# Altium PCB Debugprobe2.PcbDoc
Units mm, origin at the board's own origin, x right, y up, seen from the top; angles counter-clockwise.
Board outline 67.82 x 74.3 mm, 2 copper layers (Top Layer, Bottom Layer); 8 components, 108 nets, 280 pads, 108 vias.
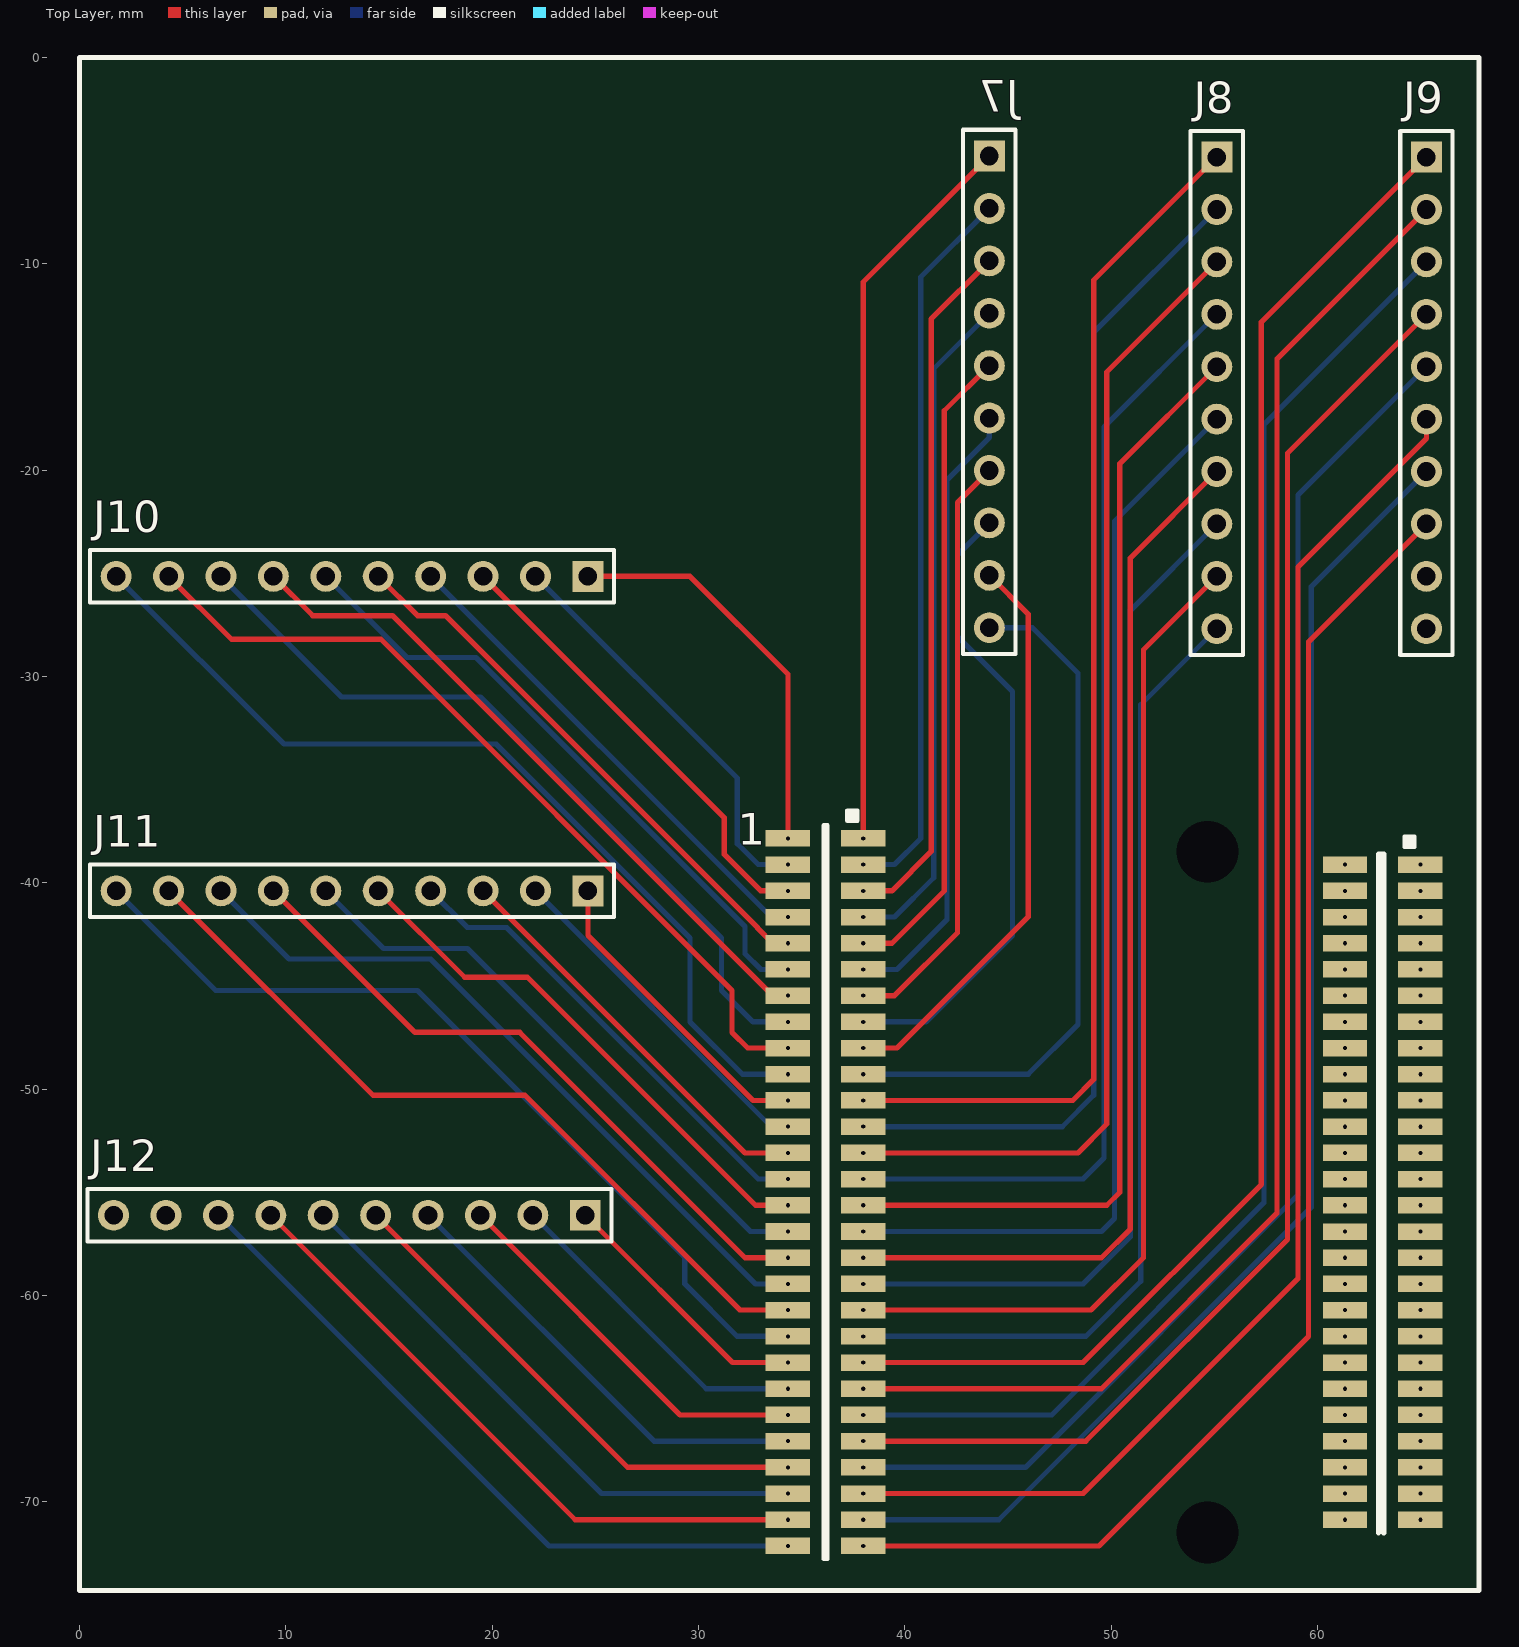
[diagram p0: Top Layer view]
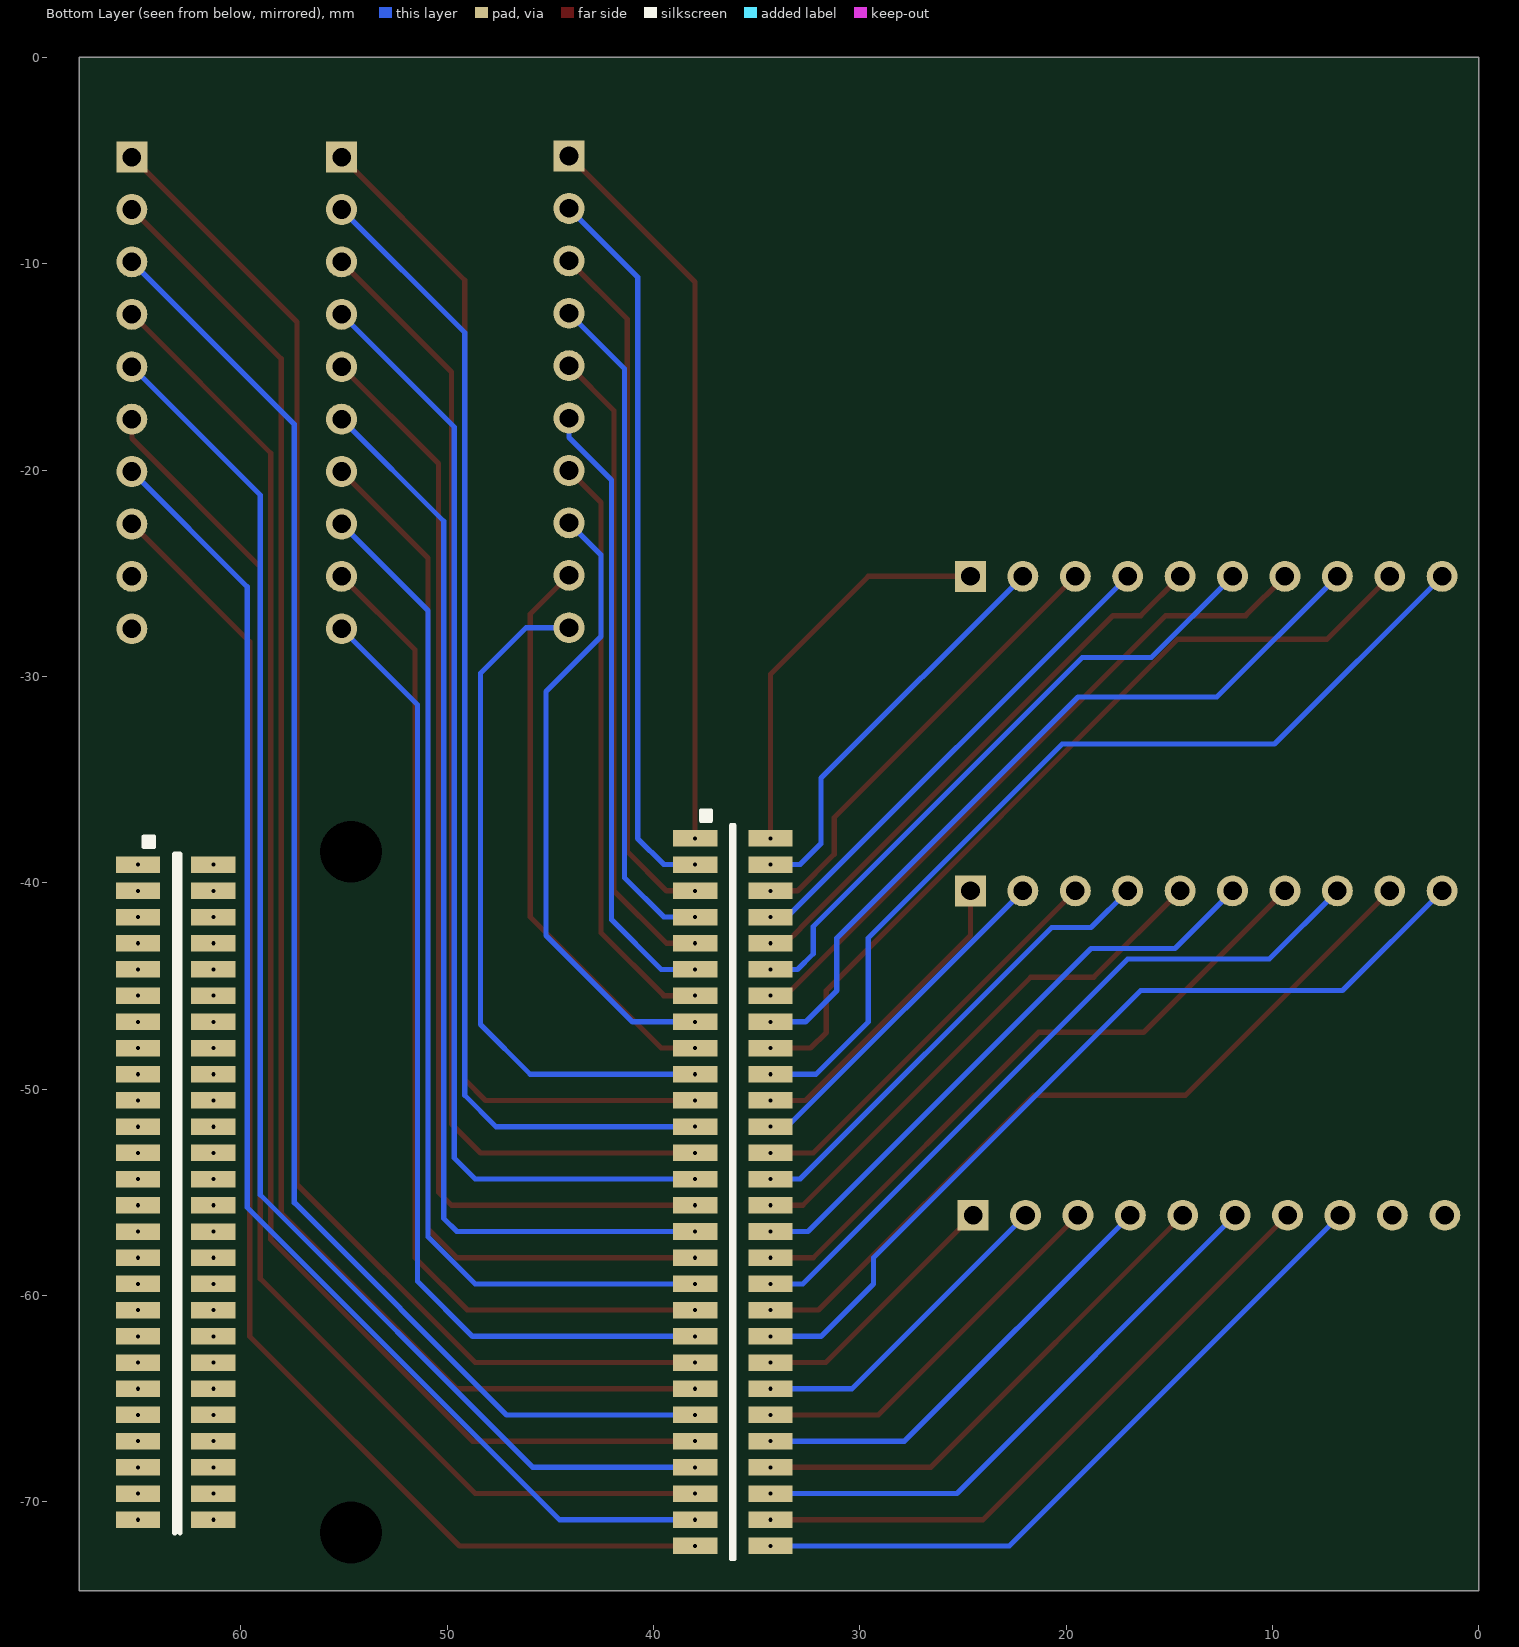
[diagram p1: Bottom Layer view, seen from below]

## Layer stack, top to bottom
Top Solder: solder mask 0.0102, Solder Resist, Dk 3.5
Top Layer: signal copper 0.0356
Dielectric 1: dielectric 0.32, FR-4, Dk 4.8
Bottom Layer: signal copper 0.0356
Bottom Solder: solder mask 0.0102, Solder Resist, Dk 3.5

## Board outline
0,-74.295 0,0 67.818,0 67.818,-74.295

## Design rules (kind name [scope] priority, off if disabled: settings)
Clearance [All] p1: gap=0.254
PolygonConnect [All] p1: connectstyle=Relief reliefconductorwidth=0.254 reliefentries=4 polygonreliefangle="90 Angle" airgapwidth=0.254
RoutingVias [All] p1: holewidth=0.711 width=1.27 viastyle="Through Hole" minholewidth=0.711 minwidth=1.27 maxholewidth=0.711 maxwidth=1.27
SolderMaskExpansion [All] p1: expansion=0.102
Width [All] p1: maxlimit=0.254 minlimit=0.254 preferedwidth=0.254
30 further rules are at their usual default settings.

## Classes and differential pairs
component class debugprobe2: 1 J7 J8 J9 J10 J11 J12

## Components (designator, comment, footprint, x,y, rotation, side; value= is the part's Value field where it differs from the comment)
1 "Anybus_CC_B40" Anybus-CC-B40#1 49.657,-54.991 r0 top
J7 "Header 10x1" "HEADER 10X1" 44.094,-4.775 r270 top
J8 "Header 10x1" "HEADER 10X1" 55.118,-4.826 r270 top
J9 "Header 10x1" "HEADER 10X1" 65.278,-4.826 r270 top
J10 "Header 10x1" "HEADER 10X1" 24.638,-25.146 r180 top
J11 "Header 10x1" "HEADER 10X1" 24.638,-40.386 r180 top
J12 "Header 10x1" "HEADER 10X1" 24.511,-56.109 r180 top
? "Anybus_CC_B40" Anybus-CC-B40#2 49.657,-54.991 r0 bottom

## Footprints (in the part's own frame and the unit in brackets; to place one, negate y for a bottom-side part, rotate by r counter-clockwise, add the part's x,y. Pads: shape width x height; smd on the part's side, far side on the other; paste and mask are expansions set on the pad)
Anybus-CC-B40#1 [mm]
  rect 2.15x0.8 smd: 1(15.325,15.874) 2(11.675,15.874) 3(15.325,14.604) 4(11.675,14.604) 5(15.325,13.334) 6(11.675,13.334) 7(15.325,12.064) 8(11.675,12.064) 9(15.325,10.794) 10(11.675,10.794) 11(15.325,9.524) 12(11.675,9.524) 13(15.325,8.254) 14(11.675,8.254) 15(15.325,6.984) 16(11.675,6.984) 17(15.325,5.714) 18(11.675,5.714) 19(15.325,4.444) 20(11.675,4.444) 21(15.325,3.174) 22(11.675,3.174) 23(15.325,1.904) 24(11.675,1.904) 25(15.325,0.634) 26(11.675,0.634) 27(15.325,-0.636) 28(11.675,-0.636) 29(15.325,-1.906) 30(11.675,-1.906) 31(15.325,-3.176) 32(11.675,-3.176) 33(15.325,-4.446) 34(11.675,-4.446) 35(15.325,-5.716) 36(11.675,-5.716) 37(15.325,-6.986) 38(11.675,-6.986) 39(15.325,-8.256) 40(11.675,-8.256) 41(15.325,-9.526) 42(11.675,-9.526) 43(15.325,-10.796) 44(11.675,-10.796) 45(15.325,-12.066) 46(11.675,-12.066) 47(15.325,-13.336) 48(11.675,-13.336) 49(15.325,-14.606) 50(11.675,-14.606) 51(15.325,-15.876) 52(11.675,-15.876) 101(-11.675,17.145) 102(-15.325,17.145) 103(-11.675,15.875) 104(-15.325,15.875) 105(-11.675,14.605) 106(-15.325,14.605) 107(-11.675,13.335) 108(-15.325,13.335) 109(-11.675,12.065) 110(-15.325,12.065) 111(-11.675,10.795) 112(-15.325,10.795) 113(-11.675,9.525) 114(-15.325,9.525) 115(-11.675,8.255) 116(-15.325,8.255) 117(-11.675,6.985) 118(-15.325,6.985) 119(-11.675,5.715) 120(-15.325,5.715) 121(-11.675,4.445) 122(-15.325,4.445) 123(-11.675,3.175) 124(-15.325,3.175) 125(-11.675,1.905) 126(-15.325,1.905) 127(-11.675,0.635) 128(-15.325,0.635) 129(-11.675,-0.635) 130(-15.325,-0.635) 131(-11.675,-1.905) 132(-15.325,-1.905) 133(-11.675,-3.175) 134(-15.325,-3.175) 135(-11.675,-4.445) 136(-15.325,-4.445) 137(-11.675,-5.715) 138(-15.325,-5.715) 139(-11.675,-6.985) 140(-15.325,-6.985) 141(-11.675,-8.255) 142(-15.325,-8.255) 143(-11.675,-9.525) 144(-15.325,-9.525) 145(-11.675,-10.795) 146(-15.325,-10.795) 147(-11.675,-12.065) 148(-15.325,-12.065) 149(-11.675,-13.335) 150(-15.325,-13.335) 151(-11.675,-14.605) 152(-15.325,-14.605) 153(-11.675,-15.875) 154(-15.325,-15.875) 155(-11.675,-17.145) 156(-15.325,-17.145)
  round 1.524 hole 3: 11(5,-16.5) 11(5,16.5)
  silkscreen extent -13.58,-17.78 15.05,18.5, body extent -15.05,-17.3 15.05,17.3, height 4.4
Anybus-CC-B40#2 [mm]
  round 1.524 hole 3: 1(5,-16.5) 1(5,16.5)
  rect 2.15x0.8 smd: 1(15.325,-15.874) 2(11.675,-15.874) 3(15.325,-14.604) 4(11.675,-14.604) 5(15.325,-13.334) 6(11.675,-13.334) 7(15.325,-12.064) 8(11.675,-12.064) 9(15.325,-10.794) 10(11.675,-10.794) 11(15.325,-9.524) 12(11.675,-9.524) 13(15.325,-8.254) 14(11.675,-8.254) 15(15.325,-6.984) 16(11.675,-6.984) 17(15.325,-5.714) 18(11.675,-5.714) 19(15.325,-4.444) 20(11.675,-4.444) 21(15.325,-3.174) 22(11.675,-3.174) 23(15.325,-1.904) 24(11.675,-1.904) 25(15.325,-0.634) 26(11.675,-0.634) 27(15.325,0.636) 28(11.675,0.636) 29(15.325,1.906) 30(11.675,1.906) 31(15.325,3.176) 32(11.675,3.176) 33(15.325,4.446) 34(11.675,4.446) 35(15.325,5.716) 36(11.675,5.716) 37(15.325,6.986) 38(11.675,6.986) 39(15.325,8.256) 40(11.675,8.256) 41(15.325,9.526) 42(11.675,9.526) 43(15.325,10.796) 44(11.675,10.796) 45(15.325,12.066) 46(11.675,12.066) 47(15.325,13.336) 48(11.675,13.336) 49(15.325,14.606) 50(11.675,14.606) 51(15.325,15.876) 52(11.675,15.876) 101(-11.675,-17.145) 102(-15.325,-17.145) 103(-11.675,-15.875) 104(-15.325,-15.875) 105(-11.675,-14.605) 106(-15.325,-14.605) 107(-11.675,-13.335) 108(-15.325,-13.335) 109(-11.675,-12.065) 110(-15.325,-12.065) 111(-11.675,-10.795) 112(-15.325,-10.795) 113(-11.675,-9.525) 114(-15.325,-9.525) 115(-11.675,-8.255) 116(-15.325,-8.255) 117(-11.675,-6.985) 118(-15.325,-6.985) 119(-11.675,-5.715) 120(-15.325,-5.715) 121(-11.675,-4.445) 122(-15.325,-4.445) 123(-11.675,-3.175) 124(-15.325,-3.175) 125(-11.675,-1.905) 126(-15.325,-1.905) 127(-11.675,-0.635) 128(-15.325,-0.635) 129(-11.675,0.635) 130(-15.325,0.635) 131(-11.675,1.905) 132(-15.325,1.905) 133(-11.675,3.175) 134(-15.325,3.175) 135(-11.675,4.445) 136(-15.325,4.445) 137(-11.675,5.715) 138(-15.325,5.715) 139(-11.675,6.985) 140(-15.325,6.985) 141(-11.675,8.255) 142(-15.325,8.255) 143(-11.675,9.525) 144(-15.325,9.525) 145(-11.675,10.795) 146(-15.325,10.795) 147(-11.675,12.065) 148(-15.325,12.065) 149(-11.675,13.335) 150(-15.325,13.335) 151(-11.675,14.605) 152(-15.325,14.605) 153(-11.675,15.875) 154(-15.325,15.875) 155(-11.675,17.145) 156(-15.325,17.145)
  silkscreen extent -13.58,-18.5 15.05,17.78, body extent -15.05,-17.3 15.05,17.3, height 4.4
"HEADER 10X1" [mm] "Connector; Header; 10 Position"
  rect 1.5x1.5 hole 0.9: 1(0,0)
  round 1.5 hole 0.9: 2(2.54,0) 3(5.08,0) 4(7.62,0) 5(10.16,0) 6(12.7,0) 7(15.24,0) 8(17.78,0) 9(20.32,0) 10(22.86,0)
  silkscreen extent -1.27,-1.27 24.13,1.27

## Via types
v1: diameter 0.5, hole 0.2, Top Layer to Bottom Layer, 108 vias

## Nets (pads, with @x,y where several pads share a name; then routed paths per layer and width w, separated by ;. In a path a pad name is that pad's centre, name@x,y a point inside that pad or via, vN(x,y) a via of type N, cw(c..) or ccw(c..) an arc to the next point about the centre after c; other vN are vias at no path point)
1: 1.1 ?.1@64.982,-39.117
  other v1: 64.982,-39.117
2: 1.2 ?.2
  other v1: 61.332,-39.117
3: 1.3 ?.3
  other v1: 64.982,-40.387
4: 1.4 ?.4
  other v1: 61.332,-40.387
5: 1.5 ?.5
  other v1: 64.982,-41.657
6: 1.6 ?.6
  other v1: 61.332,-41.657
7: 1.7 ?.7
  other v1: 64.982,-42.927
8: 1.8 ?.8
  other v1: 61.332,-42.927
9: 1.9 ?.9
  other v1: 64.982,-44.197
10: 1.10 ?.10
  other v1: 61.332,-44.197
11: 1.11@64.982,-45.467 ?.11
  other v1: 64.982,-45.467
12: 1.12 ?.12
  other v1: 61.332,-45.467
13: 1.13 ?.13
  other v1: 64.982,-46.737
14: 1.14 ?.14
  other v1: 61.332,-46.737
15: 1.15 ?.15
  other v1: 64.982,-48.007
16: 1.16 ?.16
  other v1: 61.332,-48.007
17: 1.17 ?.17
  other v1: 64.982,-49.277
18: 1.18 ?.18
  other v1: 61.332,-49.277
19: 1.19 ?.19
  other v1: 64.982,-50.547
20: 1.20 ?.20
  other v1: 61.332,-50.547
21: 1.21 ?.21
  other v1: 64.982,-51.817
22: 1.22 ?.22
  other v1: 61.332,-51.817
23: 1.23 ?.23
  other v1: 64.982,-53.087
24: 1.24 ?.24
  other v1: 61.332,-53.087
25: 1.25 ?.25
  other v1: 64.982,-54.357
26: 1.26 ?.26
  other v1: 61.332,-54.357
27: 1.27 ?.27
  other v1: 64.982,-55.627
28: 1.28 ?.28
  other v1: 61.332,-55.627
29: 1.29 ?.29
  other v1: 64.982,-56.897
30: 1.30 ?.30
  other v1: 61.332,-56.897
31: 1.31 ?.31
  other v1: 64.982,-58.167
32: 1.32 ?.32
  other v1: 61.332,-58.167
33: 1.33 ?.33
  other v1: 64.982,-59.437
34: 1.34 ?.34
  other v1: 61.332,-59.437
35: 1.35 ?.35
  other v1: 64.982,-60.707
36: 1.36 ?.36
  other v1: 61.332,-60.707
37: 1.37 ?.37
  other v1: 64.982,-61.977
38: 1.38 ?.38
  other v1: 61.332,-61.977
39: 1.39 ?.39
  other v1: 64.982,-63.247
40: 1.40 ?.40
  other v1: 61.332,-63.247
41: 1.41 ?.41
  other v1: 64.982,-64.517
42: 1.42 ?.42
  other v1: 61.332,-64.517
43: 1.43 ?.43
  other v1: 64.982,-65.787
44: 1.44 ?.44
  other v1: 61.332,-65.787
45: 1.45 ?.45
  other v1: 64.982,-67.057
46: 1.46 ?.46
  other v1: 61.332,-67.057
47: 1.47 ?.47
  other v1: 64.982,-68.327
48: 1.48 ?.48
  other v1: 61.332,-68.327
49: 1.49 ?.49
  other v1: 64.982,-69.597
50: 1.50 ?.50
  other v1: 61.332,-69.597
51: 1.51 ?.51
  other v1: 64.982,-70.867
52: 1.52 ?.52
  other v1: 61.332,-70.867
101: 1.101 ?.101 J7.1 | length 35.6
  Top Layer w0.254: v1(37.982,-37.846) 37.982,-10.888 J7.1
102: 1.102 ?.102 J10.1 | length 19.6
  Top Layer w0.254: J10.1 29.591,-25.146 34.332,-29.887 v1(34.332,-37.846)
103: 1.103 ?.103 J7.2 | length 35.2
  Bottom Layer w0.254: v1(37.982,-39.116) 39.497,-39.116 40.767,-37.846 40.767,-10.643 J7.2
104: 1.104 ?.104 J10.2 | length 19.9
  Bottom Layer w0.254: J10.2 31.877,-34.925 31.877,-38.1 32.893,-39.116 v1(34.332,-39.116)
105: 1.105 ?.105 J7.3 | length 33.9
  Top Layer w0.254: v1(37.982,-40.386) 39.37,-40.386 41.275,-38.481 41.275,-12.675 J7.3
106: 1.106 ?.106 J10.3 | length 22.1
  Top Layer w0.254: J10.3 31.242,-36.83 31.242,-38.608 33.02,-40.386 v1(34.332,-40.386)
107: 1.107 ?.107 J7.4 | length 32.7
  Bottom Layer w0.254: v1(37.982,-41.656) 39.497,-41.656 41.402,-39.751 41.402,-15.088 J7.4
108: 1.108 ?.108 J10.4 | length 24.2
  Bottom Layer w0.254: J10.4 33.528,-41.656 v1(34.332,-41.656)
109: 1.109 ?.109 J7.5 | length 31.3
  Top Layer w0.254: v1(37.982,-42.926) 39.37,-42.926 41.91,-40.386 41.91,-17.12 J7.5
110: 1.110 ?.110 J10.5 | length 27.2
  Top Layer w0.254: J10.5 16.383,-27.051 17.736,-27.051 32.876,-42.191 32.876,-42.214 33.588,-42.926 v1(34.332,-42.926)
111: 1.111 ?.111 J7.6 | length 30.2
  Bottom Layer w0.254: v1(37.982,-44.196) 39.624,-44.196 42.037,-41.783 42.037,-20.473 44.094,-18.416 J7.6
112: 1.112 ?.112 J10.6 | length 31.1
  Bottom Layer w0.254: J10.6 15.875,-29.083 19.219,-29.083 32.258,-42.122 32.258,-43.434 33.02,-44.196 v1(34.332,-44.196)
113: 1.113 ?.113 J7.7 | length 28.9
  Top Layer w0.254: v1(37.982,-45.466) 39.497,-45.466 42.545,-42.418 42.545,-21.565 J7.7
114: 1.114 ?.114 J10.7 | length 33.4
  Top Layer w0.254: J10.7 11.303,-27.051 15.173,-27.051 33.588,-45.466 v1(34.332,-45.466)
115: 1.115 ?.115 J7.8 | length 30.7
  Bottom Layer w0.254: v1(37.982,-46.736) 41.021,-46.736 45.212,-42.545 45.212,-30.734 42.545,-28.067 42.545,-24.105 J7.8
116: 1.116 ?.116 J10.8 | length 37.9
  Bottom Layer w0.254: J10.8 12.7,-30.988 19.431,-30.988 31.115,-42.672 31.115,-45.212 32.639,-46.736 v1(34.332,-46.736)
117: 1.117 ?.117 J7.9 | length 28
  Top Layer w0.254: v1(37.982,-48.006) 39.624,-48.006 45.974,-41.656 45.974,-26.975 J7.9
118: 1.118 ?.118 J10.9 | length 40.7
  Top Layer w0.254: J10.9 7.366,-28.194 14.605,-28.194 31.623,-45.212 31.623,-47.244 32.385,-48.006 v1(34.332,-48.006)
119: 1.119 ?.119 J7.10 | length 33.6
  Bottom Layer w0.254: v1(37.982,-49.276) 45.974,-49.276 48.387,-46.863 48.387,-29.845 46.177,-27.635 J7.10
120: 1.120 ?.120 J10.10 | length 44.9
  Bottom Layer w0.254: J10.10 9.906,-33.274 20.193,-33.274 29.591,-42.672 29.591,-46.736 32.131,-49.276 v1(34.332,-49.276)
121: 1.121 ?.121 J8.1 | length 58.8
  Top Layer w0.254: v1(37.982,-50.546) 48.133,-50.546 49.149,-49.53 49.149,-10.795 J8.1
122: 1.122 ?.122 J11.1 | length 15.2
  Top Layer w0.254: J11.1 24.638,-42.545 32.639,-50.546 v1(34.332,-50.546)
123: 1.123 ?.123 J8.2 | length 57.2
  Bottom Layer w0.254: v1(37.982,-51.816) 47.625,-51.816 49.149,-50.292 49.149,-13.335 J8.2
124: 1.124 ?.124 J11.2 | length 17
  Bottom Layer w0.254: J11.2 33.528,-51.816 v1(34.332,-51.816)
125: 1.125 ?.125 J8.3 | length 56.4
  Top Layer w0.254: v1(37.982,-53.086) 48.387,-53.086 49.784,-51.689 49.784,-15.24 J8.3
126: 1.126 ?.126 J11.3 | length 20
  Top Layer w0.254: J11.3 32.258,-53.086 v1(34.332,-53.086)
127: 1.127 ?.127 J8.4 | length 55.3
  Bottom Layer w0.254: v1(37.982,-54.356) 48.641,-54.356 49.657,-53.34 49.657,-17.907 J8.4
128: 1.128 ?.128 J11.4 | length 23.1
  Bottom Layer w0.254: J11.4 18.796,-42.164 20.701,-42.164 32.893,-54.356 v1(34.332,-54.356)
129: 1.129 ?.129 J8.5 | length 54.7
  Top Layer w0.254: v1(37.982,-55.626) 49.784,-55.626 50.419,-54.991 50.419,-19.685 J8.5
130: 1.130 ?.130 J11.5 | length 26.2
  Top Layer w0.254: J11.5 18.669,-44.577 21.717,-44.577 32.766,-55.626 v1(34.332,-55.626)
131: 1.131 ?.131 J8.6 | length 53.2
  Bottom Layer w0.254: v1(37.982,-56.896) 49.53,-56.896 50.165,-56.261 50.165,-22.479 J8.6
132: 1.132 ?.132 J11.6 | length 29.2
  Bottom Layer w0.254: J11.6 14.732,-43.18 18.796,-43.18 32.512,-56.896 v1(34.332,-56.896)
133: 1.133 ?.133 J8.7 | length 52
  Top Layer w0.254: v1(37.982,-58.166) 49.53,-58.166 50.927,-56.769 50.927,-24.257 J8.7
134: 1.134 ?.134 J11.7 | length 32.3
  Top Layer w0.254: J11.7 16.256,-47.244 21.336,-47.244 32.258,-58.166 v1(34.332,-58.166)
135: 1.135 ?.135 J8.8 | length 50.2
  Bottom Layer w0.254: v1(37.982,-59.436) 48.641,-59.436 50.927,-57.15 50.927,-26.797 J8.8
136: 1.136 ?.136 J11.8 | length 35.4
  Bottom Layer w0.254: J11.8 10.16,-43.688 17.018,-43.688 32.766,-59.436 v1(34.332,-59.436)
137: 1.137 ?.137 J8.9 | length 49.1
  Top Layer w0.254: v1(37.982,-60.706) 49.022,-60.706 51.562,-58.166 51.562,-28.702 J8.9
138: 1.138 ?.138 J11.9 | length 38.4
  Top Layer w0.254: J11.9 14.224,-50.292 21.59,-50.292 32.004,-60.706 v1(34.332,-60.706)
139: 1.139 ?.139 J8.10 | length 47.7
  Bottom Layer w0.254: v1(37.982,-61.976) 48.768,-61.976 51.435,-59.309 51.435,-31.369 J8.10
140: 1.140 ?.140 J11.10 | length 42.2
  Bottom Layer w0.254: J11.10 6.604,-45.212 16.383,-45.212 29.337,-58.166 29.337,-59.436 31.877,-61.976 v1(34.332,-61.976)
141: 1.141 ?.141 J9.1 | length 76
  Top Layer w0.254: v1(37.982,-63.246) 48.641,-63.246 57.277,-54.61 57.277,-12.827 J9.1
142: 1.142 ?.142 J12.1 | length 12.8
  Top Layer w0.254: J12.1 31.648,-63.246 v1(34.332,-63.246)
143: 1.143 ?.143 J9.2 | length 75.2
  Top Layer w0.254: v1(37.982,-64.516) 49.53,-64.516 58.039,-56.007 58.039,-14.605 J9.2
144: 1.144 ?.144 J12.2 | length 15.8
  Bottom Layer w0.254: J12.2 30.378,-64.516 v1(34.332,-64.516)
145: 1.145 ?.145 J9.3 | length 72.5
  Bottom Layer w0.254: v1(37.982,-65.786) 47.117,-65.786 57.404,-55.499 57.404,-17.78 J9.3
146: 1.146 ?.146 J12.3 | length 18.9
  Top Layer w0.254: J12.3 29.108,-65.786 v1(34.332,-65.786)
147: 1.147 ?.147 J9.4 | length 72.2
  Top Layer w0.254: v1(37.982,-67.056) 48.768,-67.056 58.547,-57.277 58.547,-19.177 J9.4
148: 1.148 ?.148 J12.4 | length 22
  Bottom Layer w0.254: J12.4 27.838,-67.056 v1(34.332,-67.056)
149: 1.149 ?.149 J9.5 | length 69.3
  Bottom Layer w0.254: v1(37.982,-68.326) 45.847,-68.326 59.055,-55.118 59.055,-21.209 J9.5
150: 1.150 ?.150 J12.5 | length 25
  Top Layer w0.254: J12.5 26.568,-68.326 v1(34.332,-68.326)
151: 1.151 ?.151 J9.6 | length 69.6
  Top Layer w0.254: v1(37.982,-69.596) 48.641,-69.596 59.055,-59.182 59.055,-24.69 65.278,-18.467 J9.6
152: 1.152 ?.152 J12.6 | length 28.1
  Bottom Layer w0.254: J12.6 25.298,-69.596 v1(34.332,-69.596)
153: 1.153 ?.153 J9.7 | length 66
  Bottom Layer w0.254: v1(37.982,-70.866) 44.552,-70.866 59.69,-55.728 59.69,-25.654 J9.7
154: 1.154 ?.154 J12.7 | length 31.2
  Top Layer w0.254: J12.7 24.028,-70.866 v1(34.332,-70.866)
155: 1.155 ?.155 J9.8 | length 67.5
  Top Layer w0.254: v1(37.982,-72.136) 49.403,-72.136 59.563,-61.976 59.563,-28.321 J9.8
156: 1.156 ?.156 J12.8 | length 34.2
  Bottom Layer w0.254: J12.8 22.758,-72.136 v1(34.332,-72.136)
pads on no net: 1.11@54.657,-38.491 1.11@54.657,-71.491 ?.1@54.657,-38.491 ?.1@54.657,-71.491 J9.9 J9.10 J12.9 J12.10

## Silkscreen, mask and mechanical layers (free items; w line width, h text height)
Top Overlay:
  the board outline again, w0.254